# Altium PCB golden_arduino.PcbDoc
Units mil, origin at the board's own origin, x right, y up, seen from the top; angles counter-clockwise.
Board outline 3420 x 2660 mil, 2 copper layers (Top Layer, Bottom Layer); 59 components, 44 nets, 247 pads, 46 vias.
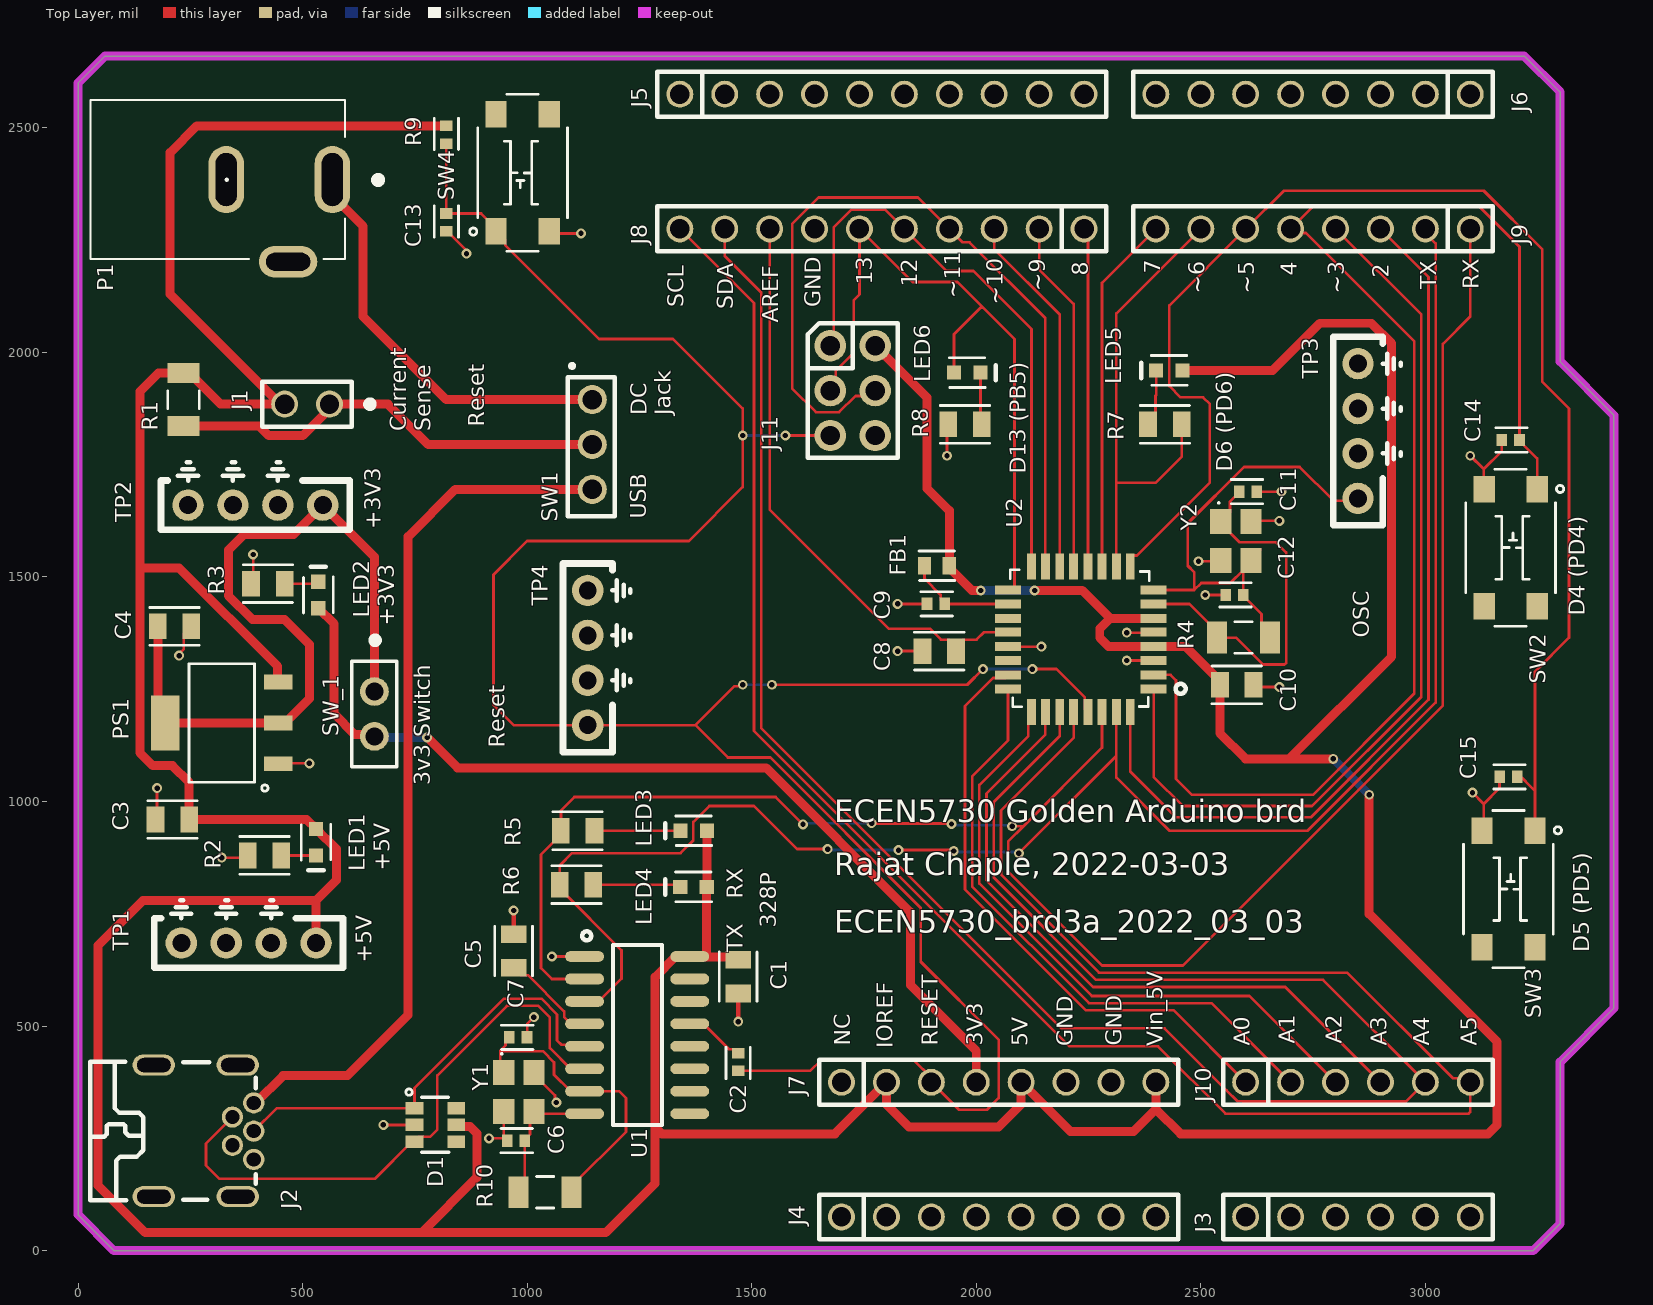
[diagram p0: Top Layer view]
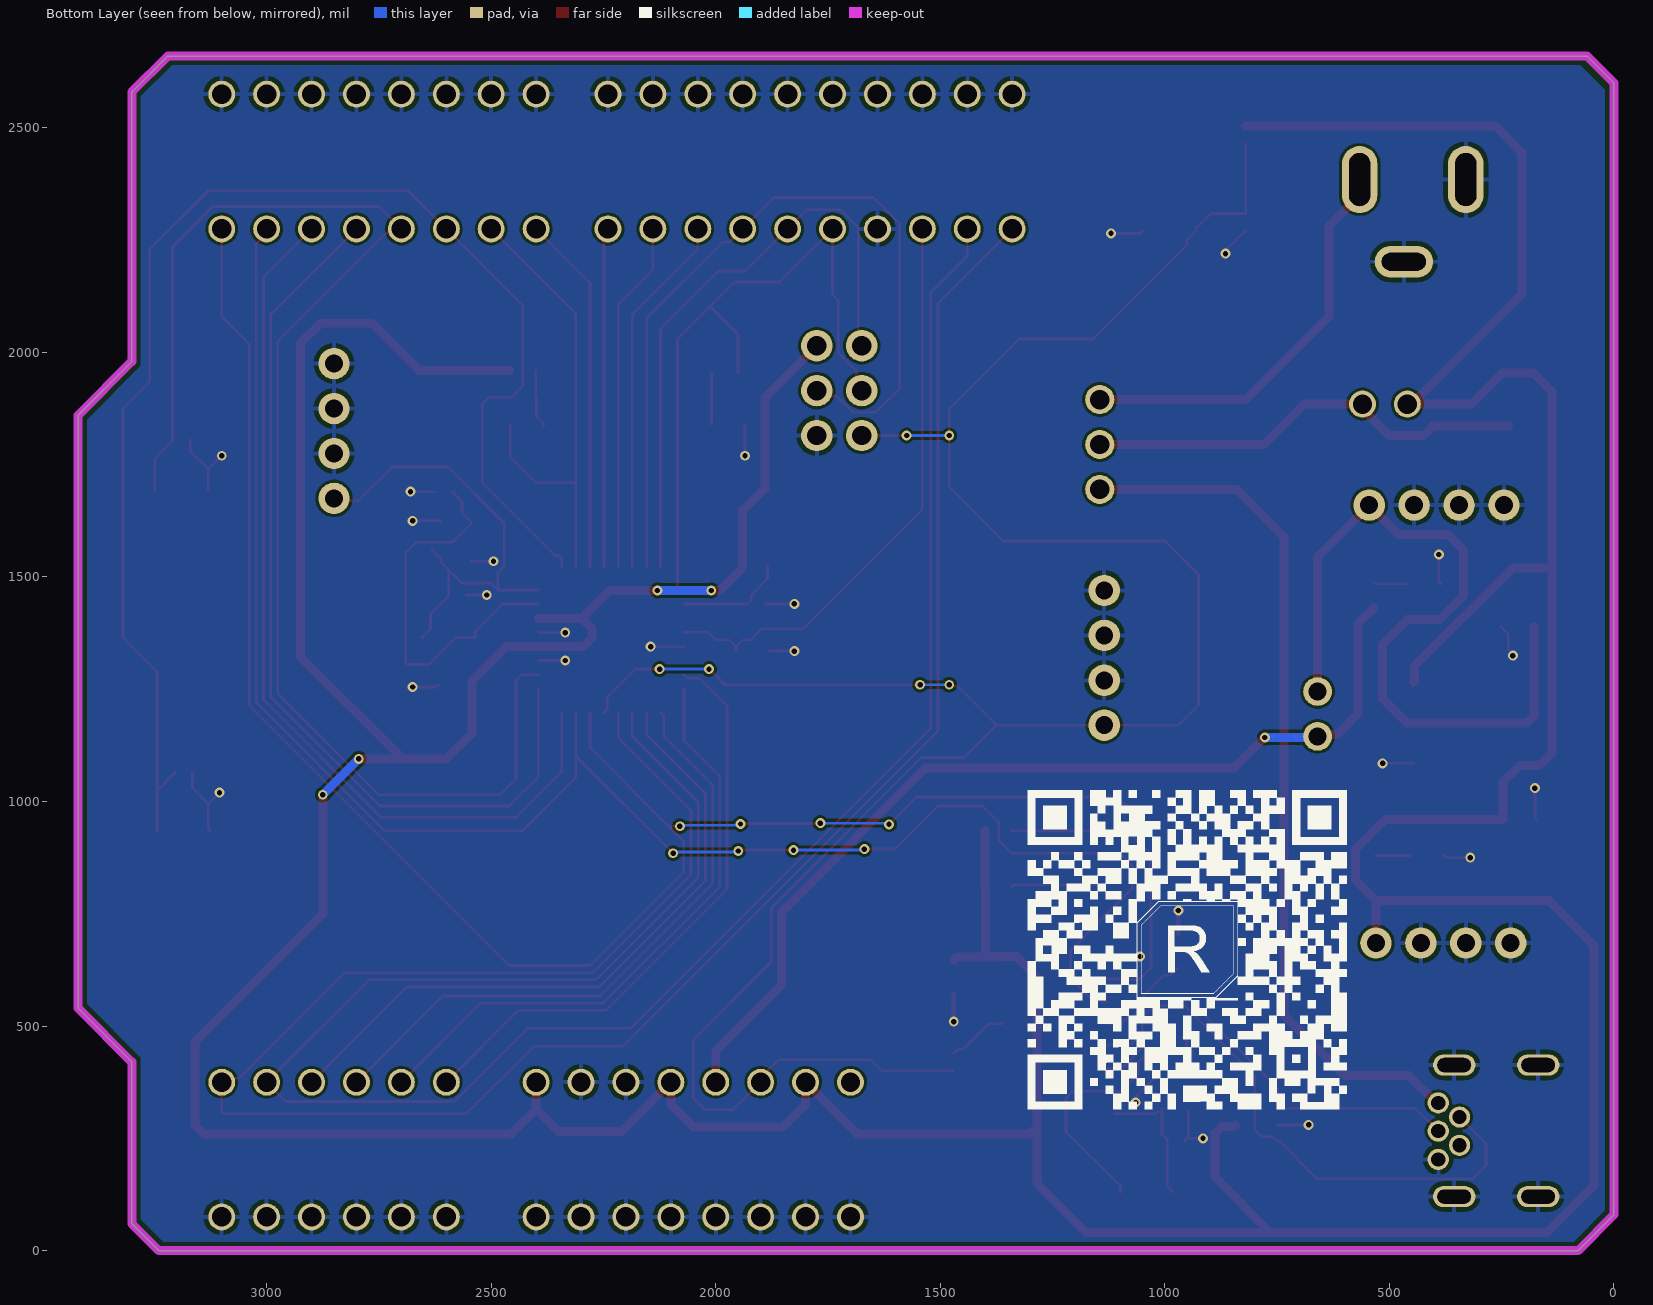
[diagram p1: Bottom Layer view, seen from below]
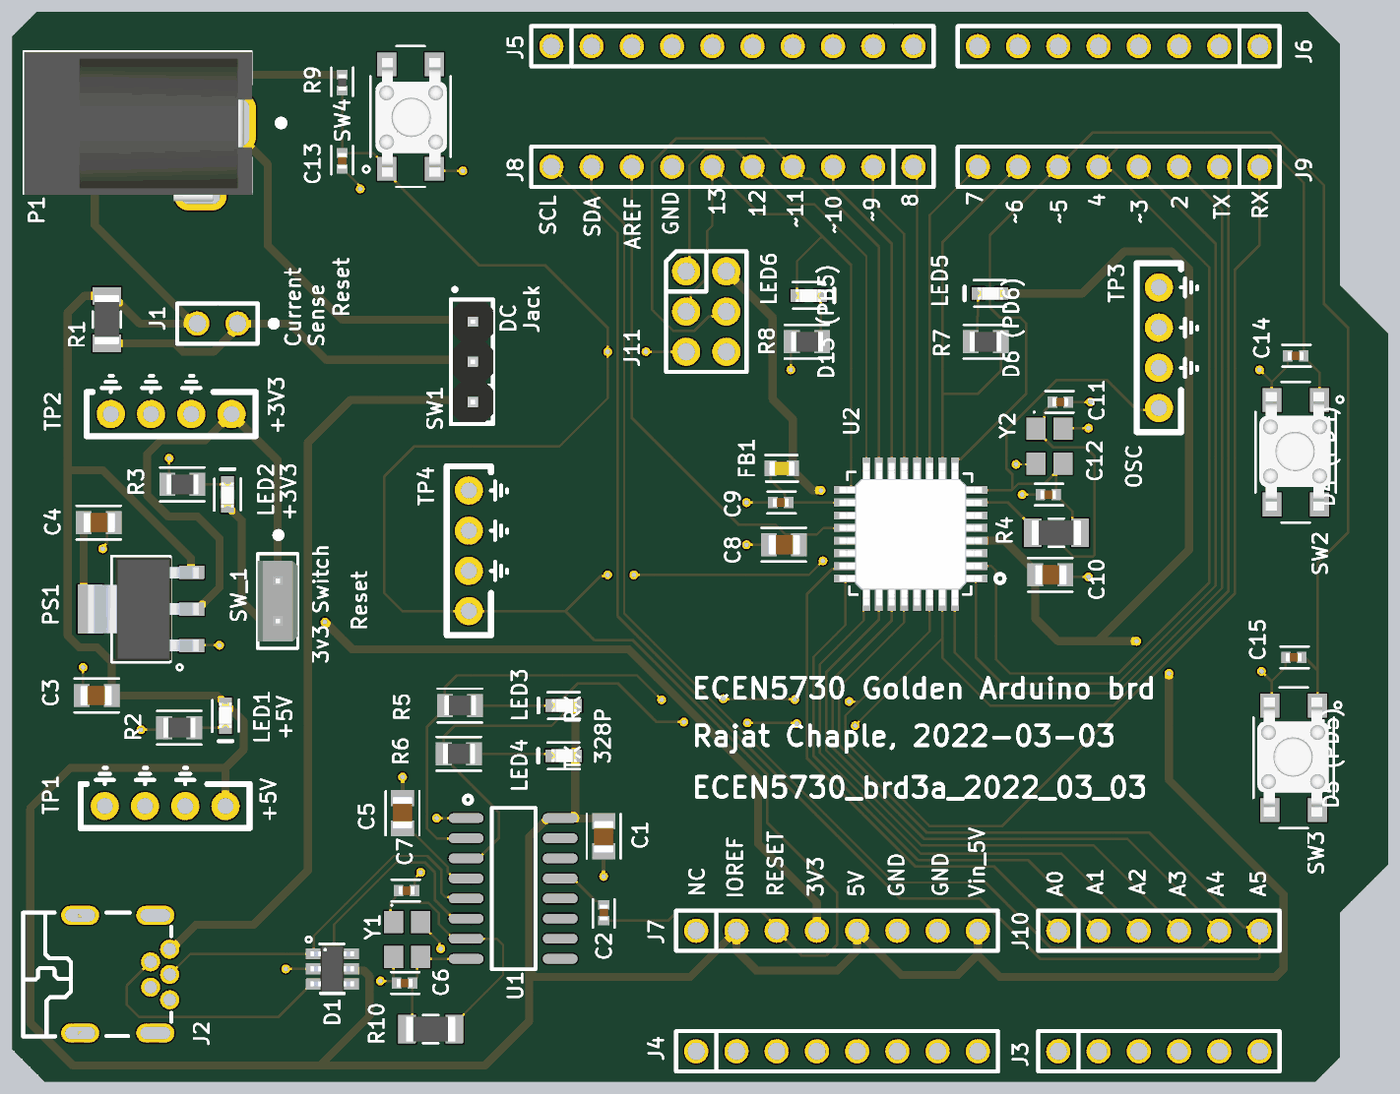
[diagram p2: 3D render of the assembled board from above, using the file's embedded part models]

## Layer stack, top to bottom
Top Solder: solder mask 0.4, Solder Resist, Dk 3.5
Top Layer: signal copper 1.4
Dielectric 1: dielectric 12.6, FR-4, Dk 4.8
Bottom Layer: signal copper 1.4
Bottom Solder: solder mask 0.4, Solder Resist, Dk 3.5

## Board outline
0,2600 60,2660 3220,2660 3300,2580 3300,1980 3420,1860 3420,540 3300,420 3300,60 3240,0 80,0 0,80

## Design rules (kind name [scope] priority, off if disabled: settings)
BoardOutlineClearance [All] p1: gap=10 ignorepadtopadclearanceinfootprint=FALSE except(0: Arc-SplitContinuation Track-SplitContinuation SMDPad-SplitContinuation THPad-SplitContinuation Via-SplitContinuation Fill-SplitContinuation Poly-SplitContinuation Region-SplitContinuation Text-SplitContinuation)
Clearance [All] p1: gap=6 ignorepadtopadclearanceinfootprint=FALSE
HoleSize [All] p1: absolutevalues=TRUE maxlimit=120 minlimit=1 maxpercent=80.000 minpercent=20.000
MinimumSolderMaskSliver [All] p1: minsoldermaskwidth=6
PlaneClearance [All] p1: clearance=10
PlaneConnect [All] p1: planeconnectstyle=Direct reliefexpansion=20 reliefentries=4 reliefconductorwidth=10 reliefairgap=10
PolygonConnect [All] p1: thpad.connectstyle=Relief thpad.reliefconductorwidth=10 thpad.reliefentries=4 thpad.polygonreliefangle="90 Angle" thpad.airgapwidth=10 smdpad.connectstyle=Direct smdpad.reliefconductorwidth=10 smdpad.reliefentries=4 smdpad.polygonreliefangle="90 Angle" smdpad.airgapwidth=10 via.connectstyle=Direct via.reliefconductorwidth=10 via.reliefentries=4 via.polygonreliefangle="90 Angle" via.airgapwidth=10
RoutingVias [All] p1: holewidth=13 width=25 viastyle="Through Hole" minholewidth=13 minwidth=25 maxholewidth=60 maxwidth=80
SilkToSolderMaskClearance [IsPad] p1: minsilkscreentomaskgap=6 clearancetoexposedcopper=TRUE
SolderMaskExpansion [All] p1: expansion=4 istentingtop=FALSE
UnRoutedNet [All] p1: checkbadconnections=TRUE
Width "Schematic Width Constraint_6" [InNet('NetC4_2')] p1: maxlimit=100 minlimit=10 preferedwidth=20 minimp=50.000000 maximp=50.000000 favimp=50.000000
Width "Schematic Width Constraint_5" [InNet('NetJ2_1')] p2: maxlimit=100 minlimit=10 preferedwidth=20 minimp=50.000000 maximp=50.000000 favimp=50.000000
Width "Schematic Width Constraint_4" [InNet('+3v3')] p3: maxlimit=100 minlimit=10 preferedwidth=20 minimp=50.000000 maximp=50.000000 favimp=50.000000
Width "Schematic Width Constraint_3" [InNet('NetP1_1')] p4: maxlimit=100 minlimit=10 preferedwidth=20 minimp=50.000000 maximp=50.000000 favimp=50.000000
Width "Schematic Width Constraint_2" [InNet('NetJ1_1')] p5: maxlimit=100 minlimit=10 preferedwidth=20 minimp=50.000000 maximp=50.000000 favimp=50.000000
Width "Schematic Width Constraint" [InNet('+5v')] p6: maxlimit=100 minlimit=10 preferedwidth=20 minimp=50.000000 maximp=50.000000 favimp=50.000000
Width [All] p7: maxlimit=100 minlimit=6 preferedwidth=6 minimp=50.000000 maximp=50.000000 favimp=50.000000
24 further rules are at their usual default settings.

## Components (designator, comment, footprint, x,y, rotation, side; value= is the part's Value field where it differs from the comment)
C1 "22uF" 0805_Passive_Capaciitor 1470,610 r90 top
C2 "22pF" 0402_Passive_Capacitor 1470,420 r270 top
C3 "22uF" 0805_Passive_Capaciitor 210,960 r0 top
C4 "22uF" 0805_Passive_Capaciitor 215,1390 r180 top
C5 "22uF" 0805_Passive_Capaciitor 970,667.4 r270 top
C6 "22pF" 0402_Passive_Capacitor 975,245 r0 top
C7 "22pF" 0402_Passive_Capacitor 980,475 r180 top
C8 "22uF" 0805_Passive_Capaciitor 1917.6,1335 r180 top
C9 "10uF" 0402_Passive_Capacitor 1910,1440 r0 top
C10 "22uF" 0805_Passive_Capaciitor 2580,1260 r180 top
C11 "22pF" 0402_Passive_Capacitor 2605,1690 r180 top
C12 "22pF" 0402_Passive_Capacitor 2575,1460 r0 top
C13 "1uF" 0402_Passive_Capacitor 820,2289.68 r90 top
C14 "1uF" 0402_Passive_Capacitor 3190,1805 r0 top
C15 "1uF" 0402_Passive_Capacitor 3185.31,1055 r0 top
D1 "SRV05-4-P-T7" TVS 795,280 r0 top value="TVS DIODE 5.5V 6TSOP"
FB1 "FB_10uH_0603" 0603_PASSIVE_Capacitor 1912.44,1525 r0 top
J1 "J_2_PIN_HEADER" 2_PIN_100MIL 560,1885 r180 top
J2 "USB Mini" USB_MINI_B 280,266.85 r270 top value="USB mini B"
J3 "PPTC061LFBN-RC" 6_PIN_ARDUINO_100mil 2600,75 r0 top value=Female
J4 "PPTC081LFBN-RC" 8_PIN_ARDUINO_100MIL 1700,75 r0 top value=Female
J5 "PPTC101LFBN-RC" 10_PIN_ARDUINO_100MIL 1340,2575 r0 top value=Female
J6 "PPTC081LFBN-RC" 8_PIN_ARDUINO_100MIL 3100,2575 r180 top value=Female
J7 "PPTC081LFBN-RC" 8_PIN_ARDUINO_100MIL 1700,375 r0 top value=Female
J8 "PPTC101LFBN-RC" 10_PIN_ARDUINO_100MIL 2240,2275 r180 top value=Female
J9 "PPTC081LFBN-RC" 8_PIN_ARDUINO_100MIL 3100,2275 r180 top value=Female
J10 "PPTC061LFBN-RC" 6_PIN_ARDUINO_100mil 2600,375 r0 top value=Female
J11 "NRPN032PAEN-RC" ICSP 1675,2015 r0 top
LED1 "KT-0603R" LED_0603 530,909.53 r270 top value=Green
LED2 "KT-0603R" LED_0603 535,1460 r90 top value=Green
LED3 "KT-0603R" LED_0603 1370.94,935 r180 top value=Blue
LED4 "KT-0603R" LED_0603 1370.47,810 r180 top value=Blue
LED5 "KT-0603R" LED_0603 2430,1960 r180 top value=Red
LED6 "KT-0603R" LED_0603 1980,1955 r0 top value=Yellow
P1 "Power Jack" Power_Jack 566.22,2385 r180 top value="CONN PWR JACK 2X5.5MM SOLDER"
PS1 "AMS1117-3.3" LDO 320,1175 r90 top value="IC REG LINEAR 3.3V 800MA SOT223"
R1 "500m" 1206_Passive_Resitor 235,1895 r90 top value="500 mOhm"
R2 "1k" 0805_Passive_Resistor 415,880 r0 top value="1K Ohm"
R3 "1k" 0805_Passive_Resistor 422.6,1485 r0 top value="1K Ohm"
R4 "1M" 1206_Passive_Resitor 2595,1365 r0 top value="1M Ohm"
R5 "1k" 0805_Passive_Resistor 1112.6,935 r0 top value="1K Ohm"
R6 "1k" 0805_Passive_Resistor 1110,815 r0 top value="1K Ohm"
R7 "1k" 0805_Passive_Resistor 2420,1840 r180 top value="1K Ohm"
R8 "1k" 0805_Passive_Resistor 1975,1840 r0 top value="1K Ohm"
R9 "10k" 0402_Passive_Resistor 820,2484.68 r90 top value=10KOhm
R10 "1M" 1206_Passive_Resitor 1040,130 r180 top value="1M Ohm"
SW1 "PREC003SAAN-RC" 3_PIN_100mil 1145,1895 r270 top value="CONN HEADER VERT 3POS 2.54MM"
SW2 "TL3305AF160QG" Switch_JLC 3190,1565 r270 top
SW3 "TL3305AF160QG" Switch_JLC 3185,805 r270 top
SW4 "TL3305AF160QG" Switch_JLC 990,2400 r90 top
SW_1 "SW_2Pin_100mil_Switch" 2Pin-Header-Conn 660,1245 r270 top
TP1 "TP_5V" TP10x_Probe 380,685 r180 top
TP2 "TP_3v3" TP10x_Probe 395,1660 r180 top
TP3 "OSC16" TP10x_Probe 2850,1825 r90 top
TP4 "RST" TP10x_Probe 1135,1320 r90 top
U1 "CH340G" "USB to serial" 1245,480 r270 top value="USB to Serial"
U2 "ATMEGA328P-ANR" ATMega328P 2231,1361 r0 top value="IC MCU 8BIT 32KB FLASH 32TQFP"
Y1 "X322512MSB4SI" "Crystal resonator" 983.5,353.32 r270 top value=12MHz
Y2 "X322516MLB4SI" "Crystal resonator" 2580,1580 r270 top value=16MHz

## Footprints (in the part's own frame and the unit in brackets; to place one, negate y for a bottom-side part, rotate by r counter-clockwise, add the part's x,y. Pads: shape width x height; smd on the part's side, far side on the other; paste and mask are expansions set on the pad)
2_PIN_100MIL [mil]
  round 60 hole 43.31: 1(0,0) 2(100,0)
  silkscreen extent -95,-50 150,50
2Pin-Header-Conn [mm]
  round 1.62 hole 1.02: 1(0,0) 2(2.54,0)
  silkscreen extent -3.03,-1.27 4.26,1.26, body extent -1.27,-1.27 3.81,1.27, height 8.13
3_PIN_100mil [mm]
  round 1.65 hole 1.1: 1(0,0) 2(2.54,0) 3(5.08,0)
  silkscreen extent -2,-1.4 6.6,1.27, body extent -1.14,-1.27 6.48,1.27, height 8.38
6_PIN_ARDUINO_100mil [mil]
  round 60 hole 43.31: 1(0,0) 2(100,0) 3(200,0) 4(300,0) 5(400,0) 6(500,0)
  silkscreen extent -50,-50 550,50
8_PIN_ARDUINO_100MIL [mil]
  round 60 hole 43.31: 1(0,0) 2(100,0) 3(200,0) 4(300,0) 5(400,0) 6(500,0) 7(600,0) 8(700,0)
  silkscreen extent -50,-50 750,50
10_PIN_ARDUINO_100MIL [mil]
  round 60 hole 43.31: 1(0,0) 2(100,0) 3(200,0) 4(300,0) 5(400,0) 6(500,0) 7(600,0) 8(700,0) 9(800,0) 10(900,0)
  silkscreen extent -50,-50 950,50
0402_Passive_Capacitor [mm] "Reference: https://www.worthingtonassembly.com/perfect-0402-footprint"
  rect 0.6x0.7 smd mask+0: 1(-0.5,0) 2(0.5,0)
  silkscreen extent -0.84,-0.69 0.94,0.69, body extent -0.5,-0.27 0.5,0.28, height 0.5
0402_Passive_Resistor [mm] "Reference: https://www.worthingtonassembly.com/perfect-0402-footprint"
  rect 0.6x0.7 smd mask+0: 1(-0.5,0) 2(0.5,0)
  silkscreen extent -0.84,-0.69 0.94,0.69, body extent -0.49,-0.25 0.51,0.25, height 0.4
0603_PASSIVE_Capacitor [mm] "Reference: http://livepartlibrary.com/fpdimensions.html"
  rect 0.75x1 smd mask+0: 1(-0.7,0) 2(0.7,0)
  silkscreen extent -1.02,-0.84 1.02,0.84, body extent -0.79,-0.45 0.81,0.45, height 0.79
0805_Passive_Capaciitor [mm] "Reference: http://livepartlibrary.com/fpdimensions.html"
  rect 1x1.45 smd mask+0: 1(-0.95,0) 2(0.95,0)
  silkscreen extent -1.4,-1.07 1.4,1.07, body extent -1.04,-0.62 0.96,0.63, height 1.4
0805_Passive_Resistor [mm] "Reference: http://livepartlibrary.com/fpdimensions.html"
  rect 1x1.45 smd mask+0: 1(-0.95,0) 2(0.95,0)
  silkscreen extent -1.4,-1.07 1.4,1.07, body extent -0.98,-0.62 1.02,0.63, height 0.5
1206_Passive_Resitor [mil]
  rect 44x71 smd: 1(-59,0) 2(59,0)
  silkscreen extent -20,-35 20,35, body extent -61,-31 61,31, height 26
ATMega328P [mil]
  rect 58x20 smd mask+1: 1(163.93,-110) 2(163.93,-79) 3(163.93,-47) 4(163.93,-16) 5(163.93,16) 6(163.93,47) 7(163.93,79) 8(163.93,110) 17(-160.07,110) 18(-160.07,79) 19(-160.07,47) 20(-160.07,16) 21(-160.07,-16) 22(-160.07,-47) 23(-160.07,-79) 24(-160.07,-110)
  rect 20x58 smd mask+1: 9(111.93,162) 10(80.93,162) 11(48.93,162) 12(17.93,162) 13(-14.07,162) 14(-45.07,162) 15(-77.07,162) 16(-108.07,162) 25(-108.07,-162) 26(-77.07,-162) 27(-45.07,-162) 28(-14.07,-162) 29(17.93,-162) 30(48.93,-162) 31(80.93,-162) 32(111.93,-162)
  silkscreen extent -155,-150 235,155, body extent -175,-177 179,177, height 46
"Crystal resonator" [mil]
  rect 55.11x47.24 smd: 1(-43.3,-35.43) 2(43.31,-35.43) 3(43.32,31.5) 4(-43.3,31.5)
  silkscreen extent -87,-42 -83,-38, body extent -65,-47 65,47, height 31
ICSP [mil]
  round 70 hole 43.31: 1(0,0) 2(0,-100) 3(0,-200) 4(100,0) 5(100,-100) 6(100,-200)
  silkscreen extent -50,-250 150,50
LDO [mil]
  rect 33x63 smd: 1(-91,-126) 2(0,-126) 3(91,-126)
  rect 122x63 smd: 4(0,126)
  silkscreen extent -152,-103 132,73, body extent -128,-144 128,132, height 73
LED_0603 [mm]
  rect 0.8x0.8 smd: 1(-0.75,0) 2(0.75,0)
  silkscreen extent -1.02,-0.84 1.6,0.84, body extent -0.84,-0.41 0.76,0.39, height 0.55
Power_Jack [mm]
  oval 2x3.8 hole 1.2 slot 3 at 90 deg: 1(0,0) 2(6,0)
  oval 3.3x1.8 hole 1 slot 2.5 at 0 deg: 3(2.5,4.65)
  silkscreen extent -2.79,-4.5 13.68,4.5, body extent -0.76,-4.45 13.64,4.95, height 11.49
Switch_JLC [mm]
  rect 1.5x1.2 smd: 1(-3.3,1.5) 2(3.3,1.5) 3(-3.3,-1.5) 4(3.3,-1.5)
  silkscreen extent -4.44,-2.54 4.45,3, body extent -3.8,-2.29 3.7,2.21, height 3.7
TP10x_Probe [mil] "Small Probs footprint"
  round 70 hole 40: 1(-150,0) 2(-50,0) 2(50,0) 2(150,0)
  silkscreen extent -210,-95 210,55
TVS [mm]
  rect 1x0.7 smd mask+0.025: 1(-1.162,0.95) 2(-1.162,0) 3(-1.162,-0.95) 4(1.2,-0.95) 5(1.2,0) 6(1.2,0.95)
  silkscreen extent -1.65,-1.55 0.76,2.03, body extent -1.37,-1.44 1.38,1.46, height 1.1
"USB to serial" [mil]
  oval 24x86.61 smd: 1(-175,-117) 2(-125,-117) 3(-75,-117) 4(-25,-117) 5(25,-117) 6(75,-117) 7(125,-117) 8(175,-117) 9(175,117) 10(125,117) 11(75,117) 12(25,117) 13(-25,117) 14(-75,117) 15(-125,117) 16(-175,117)
  silkscreen extent -231,-122 201,56
USB_MINI_B [mm]
  round 1.2 hole 0.8: 1(-1.58,2.826) 2(-0.78,1.622) 3(0.02,2.826) 4(0.82,1.622) 5(1.62,2.826)
  oval 1.2x2.4 hole 0.8 slot 1.9 at 90 deg: 6(-3.72,1.924) 7(3.72,1.924) 8(-3.72,-2.826) 9(3.72,-2.826)
  silkscreen extent -3.89,-6.42 3.93,2.93

## Part data
C1 C3 C4 C5 C8 C10: library part C_22uF_0805, "MULTILAYER CERAMIC CAPACITORS MLCC - SMD/SMT 22UF 25V 0805 ROHS", LCSC Part#=C45783, MFR Part #=CL21A226MAQNNNE, Datasheet=https://datasheet.lcsc.com/szlcsc/Samsung-Electro-Mechanics-CL21A226MAQNNNE_C45783.pdf, Type=Basic
C2 C6 C7 C11 C12: library part C_22pF_0402, "MULTILAYER CERAMIC CAPACITORS MLCC - SMD/SMT 22PF 50V 0402 ROHS", LCSC Part#=C1555, MFR Part #=0402CG220J500NT, Datasheet=https://datasheet.lcsc.com/szlcsc/Guangdong-Fenghua-Advanced-Tech-0402CG220J500NT_C1555.pdf, Type=Basic
C9: library part C_10uF_0402, "10uF ±20% 6.3V X5R 0402 Multilayer Ceramic Capacitors MLCC - SMD/SMT RoHS", LCSC Part#=C15525, MFR Part #=CL05A106MQ5NUNC, Datasheet=https://datasheet.lcsc.com/lcsc/1810191215_Samsung-Electro-Mechanics-CL05A106MQ5NUNC_C15525.pdf, Type=Basic
C13 C14 C15: library part C_1uF_0402, "MULTILAYER CERAMIC CAPACITORS MLCC - SMD/SMT 1UF 25V 0402 ROHS", LCSC Part#=C52923, MFR Part #=CL05A105KA5NQNC, Datasheet=https://datasheet.lcsc.com/szlcsc/Samsung-Electro-Mechanics-CL05A105KA5NQNC_C52923.pdf, Type=Basic
D1: library part D_TVS_Diode, "TVS SOT-23-6 ROHS", LCSC Part#=C85364, Datasheet=https://datasheet.lcsc.com/szlcsc/ProTek-Devices-SRV05-4-P-T7_C85364.pdf, MFR Part #=SRV05-4-P-T7, Type=Basic
FB1: "10 uH, 30 Q, 1.85 Ohm Series Resistance, 17MHz Self Resonant Frequency,Inductor , SMD 0603, 3 Amps rated current", LCSC Part#=C1035, MFR Part #=SDFL1608S100KTF, Datasheet=https://datasheet.lcsc.com/szlcsc/Sunlord-SDFL1608S100KTF_C1035.pdf, Type=Basic
J1: "2 Position Header Connector 0.100\" (2.54mm) Through Hole Tin"
J2: library part J_USB_B_Mini, "Through Hole USB Connectors RoHS", LCSC Part#=C46398, MFR Part #=920-462A2021D10102, Datasheet=https://datasheet.lcsc.com/szlcsc/2103081233_Jing-Extension-of-the-Electronic-Co-920-462A2021D10102_C46398.pdf, Type=Extended
J3 J10: library part JF_6_PIN_FEMALE_ARDUINO, "6 Position Header Connector 0.100\" (2.54mm) Through Hole Tin", LCSC Part#=C40877, Digikey Link=https://www.digikey.com/product-detail/en/PPTC061LFBN-RC/S7004-ND/810145/?itemSeq=304982353, Digikey Part=S7004-ND, Type=Extended
J4 J6 J7 J9: library part JF_8_PIN_FEMALE_ARDUINO, "8 Position Header Connector 0.100\" (2.54mm) Through Hole Tin", LCSC Part#=C27438, Digikey Link=https://www.digikey.com/product-detail/en/PPTC081LFBN-RC/S7006-ND/810147/?itemSeq=304982354, Digikey Part=S7006-ND, Type=Extended
J5 J8: library part JF_10_PIN_FEMALE_ARDUINO, "10 Position Header Connector 0.100\" (2.54mm) Through Hole Tin", LCSC Part#=C225507, Digikey Link=https://www.digikey.com/product-detail/en/PPTC101LFBN-RC/S7008-ND/810149/?itemSeq=304982352, Digikey Part=S7008-ND, Type=Extended
J11: library part J_ICSP, "Connector Header Through Hole 6 position 0.079\" (2.00mm)", LCSC Part#=C124384, Digikey Link=https://www.digikey.com/product-detail/en/NRPN032PAEN-RC/S5801-03-ND/804955/?itemSeq=304982355, Digikey Part=S5801-03-ND, Type=Extended
LED1 LED2: library part LED_GREEN_0603, "LIGHT EMITTING DIODES (LED) GREEN 520~535NM 112~258MCD@20MA TOP VIEW 0603 ROHS", LCSC Part#=C72043, MFR Part #=19-217/GHC-YR1S2/3T, Type=Basic
LED3 LED4: library part LED_BLUE_0603, "LIGHT EMITTING DIODES (LED) BLUE 465~475NM 11.5~28.5MCD@5MA TOP VIEW 0603 ROHS", LCSC Part#=C72041, MFR Part #=19-217/BHC-ZL1M2RY/3T, Type=Basic
LED5: library part LED_RED_0603, "LIGHT EMITTING DIODES (LED) RED 520~625NM 90~100MCD@20MA TOP VIEW 0603 ROHS", LCSC Part#=C2286, Datasheet=https://datasheet.lcsc.com/szlcsc/Everlight-Elec-19-217-BHC-ZL1M2RY-3T_C72041.pdf, MFR Part #=KT-0603R, Type=Basic
LED6: library part LED_YELLOW_0603, "LIGHT EMITTING DIODES (LED) YELLOW 585.5~591.5NM 90~180MCD@20MA TOP VIEW 0603 ROHS", LCSC Part#=C72038, MFR Part #=19-213/Y2C-CQ2R2L/3T(CY), Datasheet=https://datasheet.lcsc.com/szlcsc/Everlight-Elec-19-217-BHC-ZL1M2RY-3T_C72041.pdf, Type=Basic
P1: library part "P_Power Jack", "Power Barrel Connector Jack 2.10mm ID (0.083\"), 5.50mm OD (0.217\") Through Hole, Right Angle", LCSC Part#=C136744, Digikey Link=https://www.digikey.com/product-detail/en/PJ-102A/CP-102A-ND/275425/?itemSeq=304982367, Digikey Part=CP-102A-ND, Type=Extended
PS1: library part PS_AMS_LDO_3v3, "LOW DROPOUT REGULATORS(LDO) POSITIVE FIXED 1.3V @ 800MA 15V 3.3V 1A SOT-223 ROHS", LCSC Part#=C6186, MFR Part #=AMS1117-3.3, Type=Basic
R1: library part R_500m_1206, "CHIP RESISTOR - SURFACE MOUNT 10.5OHMS ±1% 1/4W 1206 ROHS", MFR Part #=1206W4F105JT5E, Datasheet=https://datasheet.lcsc.com/szlcsc/SUP-MRMF3216-1206-LR005FTN_C76290.pdf
R2 R3 R5 R6 R7 R8: library part R_1K_0805, "CHIP RESISTOR - SURFACE MOUNT 1KOHMS ±1% 1/8W 0805 ROHS", LCSC Part#=C17513, MFR Part #=0805W8F1001T5E, Type=Basic
R4 R10: library part R_1M_1206, "CHIP RESISTOR - SURFACE MOUNT 1MOHMS ±1% 1/4W 1206 ROHS", LCSC Part#=C17927, Digikey Link=https://www.digikey.com/product-detail/en/RMCF1206JT1M00/RMCF1206JT1M00CT-ND/1942830/?itemSeq=304982358, Digikey Part="Number RMCF1206JT1M00CT-ND", Type=Basic
R9: library part R_10KOhm_0402, "CHIP RESISTOR - SURFACE MOUNT 10KOHMS ±1% 1/16W 0402 ROHS", LCSC Part#=C25744, MFR Part #=0402WGF1002TCE, Datasheet=https://datasheet.lcsc.com/szlcsc/Uniroyal-Elec-0402WGF1002TCE_C25744.pdf, Type=Basic
SW1: library part SW_3Pin_100mil_Switch, "Connector Header Through Hole 3 position 0.100\" (2.54mm)", LCSC Part#=C429954, Digikey Link=https://www.digikey.com/product-detail/en/PREC003SAAN-RC/S1012EC-03-ND/2774851/?itemSeq=304982371, Digikey Part=S1012EC-03-ND, Type=Extended
SW2 SW3 SW4: library part SW_Push_Button_JLC, "Tactile Switch SPST-NO Top Actuated Surface Mount", LCSC Part#=C174049, MFR Part #=C174049, Type=Extended
SW_1: "2Pin Header", LCSC Part#=C124375, Type=Extended
TP1 TP2 TP3 TP4: library part TP_10x_Probe, "Test Point 300 mil centers"
U1: library part U_USBtoSerial, "Transceiver USB 2.0 2Mbps SOP-16_150mil USB ICs RoHS", LCSC Part#=C14267, Datasheet=https://datasheet.lcsc.com/lcsc/2008191806_WCH-Jiangsu-Qin-Heng-CH340G_C14267.pdf, MFR Part #=CH340G, Type=Basic
U2: library part U_ATMega328P, "AVR AVR® ATmega Microcontroller IC 8-Bit 20MHz 32KB (16K x 16) FLASH 32-TQFP (7x7)", LCSC Part#=C14877, MFR Part #=ATMEGA328P-AU, Digikey Link=https://www.digikey.com/product-detail/en/ATMEGA328P-ANR/ATMEGA328P-ANRCT-ND/2774230/?itemSeq=304982365, Type=Basic
Y1: library part X_12MHz_Res, "SMD Crystal Resonators 12MHz ±10ppm SMD-3225_4P RoHS", LCSC Part#=C9002, Datasheet=https://datasheet.lcsc.com/szlcsc/Yangxing-Tech-X322512MSB4SI_C9002.pdf, MFR Part #=X322512MSB4SI, Type=Basic
Y2: library part X_16Mhz_Res, "±10ppm 16000000Hz -40℃~85℃ 贴片无源晶振 60Ω 9pF SMD3225-4P Crystals ROHS", LCSC Part#=C13738, MFR Part #=X322516MLB4SI, Type=Basic

## Via types
v1: diameter 22, hole 12, Top Layer to Bottom Layer, 46 vias

## Nets (pads, with @x,y where several pads share a name; then routed paths per layer and width w, separated by ;. In a path a pad name is that pad's centre, name@x,y a point inside that pad or via, vN(x,y) a via of type N, cw(c..) or ccw(c..) an arc to the next point about the centre after c; other vN are vias at no path point)
+3v3: J7.4 LED2.1 SW_1.2 | length 2155.7
  Top Layer w20: LED2.1 570,1395.47 570,1195 616.24,1148.76 656.24,1148.76 SW_1.2 ; v1(777.28,1142.72) 845,1075 1532.22,1075 1853.41,753.81 1853.41,591.59 2000,445 J7.4
  Bottom Layer w20: SW_1.2 661.9,1143.1 776.9,1143.1 v1(777.28,1142.72)
+5v: C1.2 C3.2 C10.2 D1.5 FB1.2 J1.2 J7.2 J7.5 J7.8 J11.4 LED1.1 LED3.1 LED4.1 LED5.1 PS1.3 R1.2 R9.2 TP1.1 U1.16 U2.4 U2.6 | length 13931.4
  Top Layer w20: J1.2@440,1885 317.5,1885 248.5,1954 R1.2 179,1954 137.91,1912.91 137.91,1520 ; PS1.3 444.22,1267.78 444.22,1300.78 225,1520 137.91,1520 ; J1.2 450,1885 205,2130 205,2445 264.37,2504.37 R9.2 ; TP1.1 530,780 ; D1.5 846.02,276.22 872.96,276.22 888,261.18 888,163 765,40 ; LED4.1@1399.06,800 1399.06,661.83 1392.22,655 U1.16 ; LED4.1 1400.24,810.24 1400.24,934.76 LED3.1 ; C1.2 1463.17,654.23 1362.77,654.23 U1.16 ; J11.4 1890,1900 1890,1697.56 1940,1647.56 FB1.2 1940,1520.08 1990.08,1470 v1(2010,1470) ; v1(2130,1470) 2236,1470 2298,1408 ; U2.6 2298,1408 ; J7.8 2400,315 ; LED5.1 2660,1960 2765,2065 2880,2065 2925,2020 2925,1322.5 2697.5,1095 ; C10.2 2542.6,1152.4 2600,1095 2697.5,1095 ; C10.2@2542.6,1268.86 2466.46,1345 U2.4 2295,1345 2275,1365 2275,1385 2298,1408 ; v1(2795,1095) 2697.5,1095 ; v1(2875,1015) 2875,750 3160,465 3160,280 3140,260 2455,260 2400,315 ; 137.91,1520 137.91,1108.8 166.72,1080 210,1080 247.4,1042.6 C3.2 509.06,960 LED1.1 550.88,918.17 551.61,918.17 575,894.78 575,825 530,780 ; 530,780 145,780 45,680 45,145 150,40 765,40 ; 765,40 1175,40 1285,150 1285,275 ; 1285,275 1300,260 1685,260 J7.2 1800,325.71 1850,275.71 2050,275.71 2100,325.71 J7.5 2210,265 2350,265 2400,315 ; 1285,275 1285,609.31 1330.69,655 U1.16
  Bottom Layer w20: v1(2010,1470) v1(2130,1470) ; v1(2795,1095) v1(2875,1015)
AD4/SDA: J8.9 J10.5 U2.27 | length 4564.9
  Top Layer w6: J8.9 1440,2215 1521,2134 1521,1164 2190,495 2419.19,495 2557.69,356.49 2581.49,332.69 2592.31,332.69 2593,332 2957,332 J10.5 2772,603 2301.75,603 2266.75,603 2039,830.75 2039,865.75 2039,999 2185.93,1145.93 U2.27
AD5/SCL: J8.10 J10.6 U2.28 | length 4867.2
  Top Layer w6: J8.10 1505,2110 1505,1157.37 2207.37,455 2405,455 2555,305 3096.49,305 3100,308.51 J10.6 3091,384 3061,384 2826,619 2273.37,619 2055,837.37 2055,980 2216.93,1141.93 U2.28
AREF: C8.1 J8.8 U2.20 | length 1305.3
  Top Layer w6: J8.8 1540,1650 1541.76,1648.24 1577.11,1612.89 1697.89,1492.11 1805,1385 1896.81,1385 1921.27,1360.54 1938.31,1360.54 C8.1@1955,1343.86 ; C8.1 C8.1@1955,1343.86 ; U2.20 2017,1377 2000.54,1360.54 1971.69,1360.54 C8.1@1955,1343.86
AVCC: C9.2 FB1.1 U2.18 | length 244.8
  Top Layer w6: FB1.1 1884.88,1496.31 1920.87,1460.32 1920.87,1448.81 C9.2 U2.18
GND: C1.1 C3.1 C4.1 C5.1 C6.1 C7.1 C8.2 C9.1 C10.1 C11.1 C12.1 C13.1 C14.1 C15.1 D1.2 J2.5 J2.6 J2.7 J2.8 J2.9 J3.1 J3.2 J3.3 J3.4 J3.5 J3.6 J4.1 J4.2 J4.3 J4.4 J4.5 J4.6 J4.7 J4.8 J5.1 J5.2 J5.3 J5.4 J5.5 J5.6 J5.7 J5.8 J5.9 J5.10 J6.1 J6.2 J6.3 J6.4 J6.5 J6.6 J6.7 J6.8 J7.6 J7.7 J8.7 J11.6 P1.2 P1.3 PS1.1 R2.1 R3.1 R8.1 SW2.3 SW3.3 SW4.3 TP1.2 TP2.2 TP3.2 TP4.2 U1.1 U2.3 U2.5 U2.21 Y1.2 Y1.4 Y2.2 Y2.4 | length 1997.8
  Top Layer w6: C3.1 176,963.4 v1(176,1030) ; v1(225,1325) 225,1329.33 235.72,1340.05 235.72,1373.31 C4.1 ; v1(320,875) 372.6,875 R2.1 ; R3.1 390,1489.8 v1(390,1550) ; PS1.1 447,1085 v1(515,1085) ; v1(680,280) D1.2 ; C13.1 821.97,2270 861.94,2230.03 861.94,2223.06 v1(865,2220) ; v1(915,250) C6.1@950.32,250 ; Y1.2 948.07,254.21 955.32,246.97 C6.1 ; C7.1 1000,475.32 1000,505 v1(1015,520) ; Y1.4 1015,392.69 1061.94,345.75 1061.94,333.06 v1(1065,330) ; SW4.3 1054.13,2265 v1(1120,2265) ; v1(1055,655) U1.1 ; v1(1825,1335) C8.2 ; v1(1825,1440) C9.1 ; v1(1935,1770) 1935,1837.4 R8.1 ; U2.21 v1(2145,1345) ; v1(2335,1314) U2.3 ; v1(2335,1376) 2393.93,1376 U2.5 ; v1(2495,1535) 2542.88,1535 Y2.2 ; v1(2510,1460) C12.1 ; Y2.4 2613.2,1625 v1(2675,1625) ; C10.1 2622.4,1255 v1(2675,1255) ; C11.1 v1(2679.68,1690) ; v1(3100,1770) 3130,1740 ; v1(3105,1020) 3130,995 ; SW3.3 3130,938.98 3130,995 ; SW2.3 3130,1695.87 3130,1740 ; C15.1@3165.31,1065 3165.31,1030.32 3130,995 ; C14.1 3170.31,1780.32 3130,1740
  Top Layer w10: C5.1 v1(970,757.4) ; v1(1470,510) C1.1
LED0_328P: J9.7 R7.1 U2.10 | length 1071.7
  Top Layer w6: U2.10 2311.93,1710 ; R7.1 2457.4,1767.4 2400,1710 2311.93,1710 ; J9.7 2311.93,2086.93 2311.93,1710
NetC2_1: C2.1 U1.13 | length 135.1
  Top Layer w6: U1.13 1393.31,505 1449.81,448.5 1461.19,448.5 C2.1
NetC4_2: C4.2 PS1.2 PS1.4 SW_1.1 TP2.1 | length 1726.6
  Top Layer w20: C4.2 177.6,1191.4 PS1.4 PS1.2 461,1175 515,1229 515,1350 460,1405 388.68,1405 335,1458.68 335,1560 370,1595 480,1595 TP2.1 660,1545 SW_1.1
NetC5_2: C5.2 U1.4 | length 216.8
  Top Layer w6: C5.2 986.69,613.31 1001.94,613.31 1082.59,532.66 1082.59,520.6 1098.19,505 U1.4
NetJ1_1: J1.1 R1.1 SW1.2 | length 1015
  Top Layer w20: R1.1 404,1836 425,1815 500,1815 J1.1@570,1885 ; J1.1@540,1885 690,1885 780,1795 SW1.2
NetJ2_1: J2.1 SW1.3 | length 1943.4
  Top Layer w20: J2.1 395.93,329.06 456.87,390 600,390 735,525 735,1590 840,1695 SW1.3
NetLED1_2: LED1.2 R2.2 | length 77.6
  Top Layer w6: R2.2 LED1.2
NetLED2_2: LED2.2 R3.2 | length 76.9
  Top Layer w6: R3.2 530.47,1485 LED2.2
NetLED3_2: LED3.2 R5.2 | length 191.4
  Top Layer w6: R5.2 LED3.2
NetLED4_2: LED4.2 R6.2 | length 195.6
  Top Layer w6: R6.2 1335.94,815 LED4.2
NetLED5_2: LED5.2 R7.2 | length 131.5
  Top Layer w6: R7.2@2385.47,1837.13 R7.2 2399.28,1856.69 2399.28,1903.3 2400.47,1904.49 LED5.2
NetLED6_2: LED6.2 R8.2 | length 116.2
  Top Layer w6: LED6.2 2009.53,1842.87 R8.2
NetP1_1: P1.1 SW1.1 | length 920.1
  Top Layer w20: P1.1 566.22,2349.57 635,2280.79 635,2080 820,1895 SW1.1
PB0: J8.1 U2.12 | length 755.7
  Top Layer w6: J8.1 2248.93,2266.07 U2.12
PB1: J8.2 U2.13 | length 783.9
  Top Layer w6: J8.2 2140,2185 2216.93,2108.07 U2.13
PB2/SS: J8.3 U2.14 | length 812.4
  Top Layer w6: J8.3 2040,2230.19 2185.93,2084.26 U2.14
PB3/MOSI: J8.4 J11.5 U2.15 | length 1845.6
  Top Layer w6: J11.5 1763.12,1903.12 1731,1903.12 1694.88,1867 1643,1867 1590,1920 1590,2285.81 1649.19,2345 1870,2345 J8.4 1970,2245 1985,2245 2153.93,2076.07 U2.15
PB4/MISO: J8.5 J11.1 U2.16 | length 1362.5
  Top Layer w6: J11.1 1683,2023 1683,2278.81 1722.19,2318 1797,2318 J8.5 1933.81,2181.19 1993.81,2181.19 2122.93,2052.07 U2.16
PB5/SCK: J8.6 J11.2 LED6.1 U2.17 | length 1577
  Top Layer w6: J11.2 1686.88,1926.88 1686.88,1959 1727,1999.12 1727,2115.85 1740,2128.85 J8.6 1857.96,2157.04 1957.96,2157.04 2015,2100 ; LED6.1 1950.47,2040.47 2010,2100 2015,2100 ; U2.17 2078,1471 2085,1478 2085,2030 2015,2100
PC0: J10.1 U2.23 | length 1335.8
  Top Layer w6: U2.23 2063.93,1275 2037.54,1275 1975,1212.46 1975,804.24 2244.24,535 2440,535 J10.1
PC1: J10.2 U2.24 | length 1362.8
  Top Layer w6: U2.24 2070.93,1135.93 1991,1056 1991,810.86 2250.86,551 2524,551 J10.2
PC2: J10.3 U2.25 | length 1405.8
  Top Layer w6: U2.25 2115.93,1192 2115.93,1145.93 2007,1037 2007,817.49 2257.49,567 2608,567 J10.3
PC3: J10.4 U2.26 | length 1492.1
  Top Layer w6: U2.26 2153.93,1148.93 2023,1018 2023,859.12 2023,824.12 2260.12,587 2295.12,587 2688,587 J10.4
PD2: J9.3 U2.32 | length 2039.3
  Top Layer w6: U2.32 2342.93,1067.07 2445,965 2745.25,965 3007,1226.75 3007,2168 J9.3
PD3: J9.4 U2.1 | length 2040.5
  Top Layer w6: U2.1 2394.93,1055.07 2460,990 2747.63,990 2991,1233.37 2991,2084 J9.4
PD7: J9.8 U2.11 | length 801.7
  Top Layer w6: U2.11 2279.93,2154.93 J9.8
Reset: C2.2 C13.2 J7.3 J11.3 R9.1 SW4.1 TP4.1 U2.29 | length 5562.5
  Top Layer w6: R9.1 C13.2 897.56,2309.37 SW4.1@930.94,2275.98 ; SW4.1 951.57,2249.46 951.57,2238.43 1160,2030 1325,2030 1480,1875 v1(1480,1815) 1480,1700 1360,1580 1000,1580 925,1505 925,1215 970,1170 TP4.1 1375,1170 ; C2.2 1630.31,400.31 1655,425 1860,425 1900,385 J7.3 1961.26,313.74 2023.74,313.74 2050,340 2050,469.75 1876.41,643.34 1876.41,763.34 1541.75,1098 1447,1098 1375,1170 ; v1(1480,1260) 1476.94,1256.94 1461.94,1256.94 1375,1170 ; v1(1545,1260) 1980,1260 v1(2015,1295) ; v1(1575,1815) J11.3 ; v1(2125,1295) 2178.31,1295 2241.93,1231.38 2241.93,1206 U2.29
  Bottom Layer w6: v1(1480,1260) v1(1545,1260) ; v1(1480,1815) v1(1575,1815) ; v1(2015,1295) v1(2125,1295)
RXD_328P: J9.1 R5.1 U1.2 U2.30 | length 4370.3
  Top Layer w6: U1.2 1055,605 1031,629 1031,881.94 1075.2,926.14 R5.1 1075.2,980.2 1105,1010 1553.38,1010 v1(1614.19,949.19) ; v1(1766.97,951.97) 1767.96,950.99 1944.01,950.99 v1(1945,950) ; v1(2080,945) 2105,945 ; U2.30 2279.93,1119.93 2105,945 ; J9.1 3100,2080 3039,2019 3039,1213.49 2460.51,635 2280,635 2071,844 2071,911 2105,945
  Bottom Layer w6: v1(1614.19,949.19) 1616.97,951.97 v1(1766.97,951.97) ; v1(1945,950) 1947.5,947.5 2077.5,947.5 v1(2080,945)
SW0_328P: C14.2 J9.5 SW2.1 U2.2 | length 3200.5
  Top Layer w6: U2.2 2433,1282 2445,1270 2445,1050 2480,1015 2750,1015 2975,1240 2975,2025 2734.08,2265.92 2709.08,2265.92 J9.5 2750,2325 3120,2325 3209.69,2235.32 C14.2 3209.69,1803.03 3249.06,1763.66 SW2.1
SW1_328P: C15.2 J9.6 SW3.1 U2.9 | length 3125
  Top Layer w6: U2.9 2342.93,1540.83 2349.93,1547.83 2357.83,1547.83 2520,1710 2520,1885 2505,1900 2455,1900 2430,1925 2430,2105 J9.6 2685,2360 3130,2360 3260,2230 3260,1935 3320,1875 3320,1365 3244.06,1289.06 3244.06,1023.66 ; C15.2@3204.69,1065 3204.69,1063.03 3244.06,1023.66 ; SW3.1 3244.06,1023.66
TXD_328P: J9.2 R6.1 U1.3 U2.31 | length 3951.6
  Top Layer w6: U1.3 1159.31,555 1210,605.69 1210,668.74 1072.6,806.14 R6.1 1072.6,857.6 1100,885 1341.3,885 1370.17,913.87 1370.17,954.57 1405.59,990 1505,990 1600.81,894.19 v1(1669.19,894.19) ; v1(1826.97,891.97) 1948.03,891.97 v1(1950,890) ; v1(2095,885) 2311.93,1101.93 ; U2.31 2311.93,1101.93 ; J9.2 3000,2265.85 3023,2242.85 3023,1220.12 2737.88,935 2430,935 2311.93,1053.07 2311.93,1101.93
  Bottom Layer w6: v1(1669.19,894.19) 1671.41,891.97 v1(1826.97,891.97) ; v1(1950,890) 1952.5,887.5 2092.5,887.5 v1(2095,885)
USB_D+: D1.1 J2.3 U1.5 | length 962.6
  Top Layer w6: J2.3 442.59,317.4 D1.1 749.23,361.86 948.37,561 1031.63,561 1066.59,526.04 1066.59,468.41 1076.56,458.44 1124.56,458.44 U1.5
USB_D-: D1.3 J2.2 U1.6 | length 1315
  Top Layer w6: J2.2 285,238.7 285,190 315,160 660.73,160 743.33,242.6 D1.3 760.01,253.38 783.38,253.38 800,270 800,390 955,545 1025,545 1050.59,519.41 1050.59,451.4 1096.99,405 U1.6
XI_CH340G: C7.2 R10.1 U1.7 Y1.1 | length 690
  Top Layer w6: Y1.1 940,404.69 940,445 ; C7.2 952,466.68 952,457 940,445 ; R10.1 1099,143.5 1220,264.5 1220,340 1205,355 U1.7 1096.69,355 1060,391.69 1060,419.36 1035.1,444.27 940.73,444.27 940,445
XO_CH340G: C6.2 R10.2 U1.8 Y1.3 | length 297.3
  Top Layer w6: R10.2 994.69,143.69 C6.2 994.69,246.97 1006.5,258.78 Y1.3@1006.5,316.68 ; Y1.3 1020,305 U1.8@1113,305
XTAL1_328P: C11.2 R4.1 U2.7 Y2.1 | length 866.4
  Top Layer w6: U2.7 2474.5,1440 2536,1378.5 R4.1 2578.12,1365 2638.12,1305 2686.49,1305 2690,1308.51 2690,1555 2667.76,1577.24 2586.7,1577.24 2544.57,1619.37 Y2.1 2565.19,1643.92 2565.19,1667.91 2585.31,1688.03 C11.2
XTAL2_328P: C12.2 R4.2 TP3.1 U2.8 Y2.3 | length 1073.3
  Top Layer w6: U2.8 2485.34,1471 ; Y2.3@2632.12,1561.24 2611.5,1540.62 Y2.3 2611.5,1532.75 Y2.3@2594.69,1515.93 ; R4.2 2635,1384 2635,1417.72 2594.69,1458.03 C12.2 Y2.3@2594.69,1515.93 ; TP3.1 2845,1670 2795,1670 2720,1745 2596.34,1745 2471,1619.66 2471,1525.06 2485.34,1510.72 2485.34,1471 ; 2485.34,1471 2501.12,1486.78 2565.53,1486.78 Y2.3@2594.69,1515.93
pads on no net: D1.4 D1.6 J2.4 J7.1 SW2.2 SW2.4 SW3.2 SW3.4 SW4.2 SW4.4 U1.9 U1.10 U1.11 U1.12 U1.14 U1.15 U2.19 U2.22

## Polygon pours and split planes (outlines as drawn)
GND on Bottom Layer "GND_L02_P000" (solid, pour order 0): 3210,2640 3280,2570 3280,1970 3400,1850 3400,550 3280,430 3280,70 3230,20 90,20 20,90 20,2585 75,2640

## Keep-outs
Keep-Out Layer:
  the board outline again, w20

## Silkscreen, mask and mechanical layers (free items; w line width, h text height)
Top Overlay:
  text "8" at 2249,2171 h36 r90
  text "4" at 2714,2171 h36 r90
  text "2" at 2919,2166 h36 r90
  text "13" at 1769,2151 h36 r90
  text "12" at 1869,2146 h36 r90
  text "TX" at 3024,2141 h36 r90
  text "RX" at 3119,2141 h36 r90
  text "~9" at 2154,2136 h36 r90
  text "~6" at 2509,2131 h36 r90
  text "~5" at 2619,2131 h36 r90
  text "~3" at 2819,2131 h36 r90
  text "~11" at 1964,2121 h36 r90
  text "~10" at 2059,2106 h36 r90
  text "SCL" at 1349,2101 h36 r90
  text "GND" at 1654,2101 h36 r90
  text "SDA" at 1459,2096 h36 r90
  text "AREF" at 1559,2066 h36 r90
  text "DC / Jack" at 1320,1860 h36 r90
  text "Reset" at 905,1834.04 h36 r90
  text "Current  / Sense" at 785,1825 h36 r90
  text "D6 (PD6)" at 2570,1734.04 h36 r90
  text "D13 (PB5)" at 2110,1729.52 h36 r90
  text "USB" at 1265,1630 h36 r90
  text "+3V3" at 674,1606 h36 r90
  text "D4 (PD4)" at 3355,1414.04 h36 r90
  text "+3V3" at 704,1391 h36 r90
  text "OSC" at 2875,1365.05 h36 r90
  text "Reset" at 950,1120 h36 r90
  text "3v3 Switch" at 784,1036 h36 r90
  text "ECEN5730 Golden Arduino brd" at 1684,954 h50
  text "+5V" at 694,846 h36 r90
  text "Rajat Chaple, 2022-03-03" at 1684,835.66 h50
  text "RX" at 1480,784.04 h36 r90
  text "328P" at 1555,719.04 h36 r90
  text "ECEN5730_brd3a_2022_03_03" at 1684,707.33 h50
  text "TX" at 1480,664.04 h36 r90
  text "D5 (PD5)" at 3365,664.04 h36 r90
  text "+5V" at 654,641 h36 r90
  text "A1" at 2709,461 h36 r90
  text "A2" at 2814,461 h36 r90
  text "RESET" at 1914,456 h36 r90
  text "3V3" at 2014,456 h36 r90
  text "GND" at 2324,456 h36 r90
  text "A0" at 2609,456 h36 r90
  text "A3" at 2914,456 h36 r90
  text "A4" at 3009,456 h36 r90
  text "A5" at 3114,456 h36 r90
  text "IOREF" at 1814,451 h36 r90
Bottom Overlay:
  drawing of 117 lines, arcs and shapes, not listed

## Text inside footprints (layer, text, board x,y; h text height)
J7: Top Overlay "NC" at 1719,456 h36 r90; Top Overlay "GND" at 2215,455 h36 r90; Top Overlay "Vin_5V" at 2415,455 h36 r90; Top Overlay "5V" at 2115,455 h36 r90
J9: Top Overlay "7" at 2410,2175 h36 r90